# Altium PCB SignalBoard.PcbDoc
Units mm, origin at the board's own origin, x right, y up, seen from the top; angles counter-clockwise.
Board outline 68.58 x 53.34 mm, 2 copper layers (Top Layer, Bottom Layer); 35 components, 39 nets, 133 pads, 32 vias.
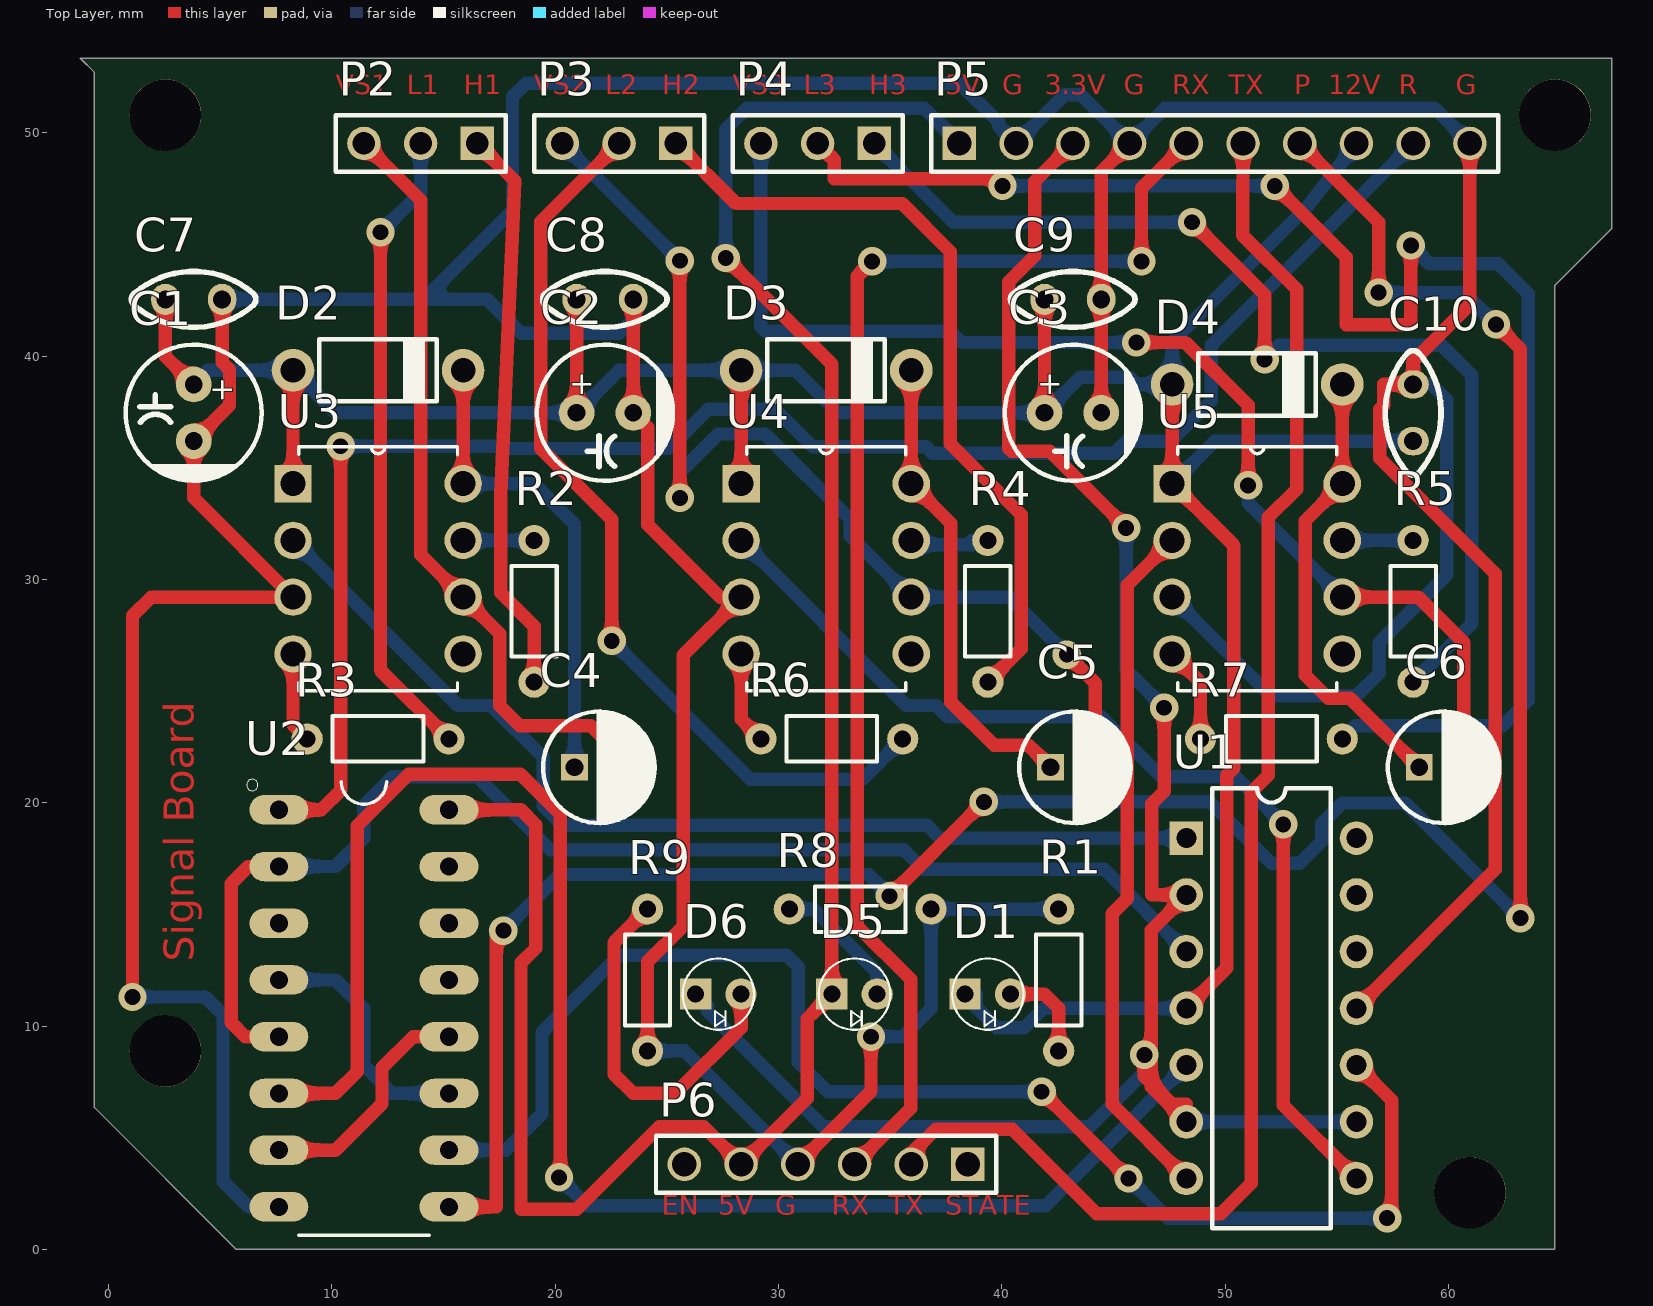
[diagram p0: Top Layer view]
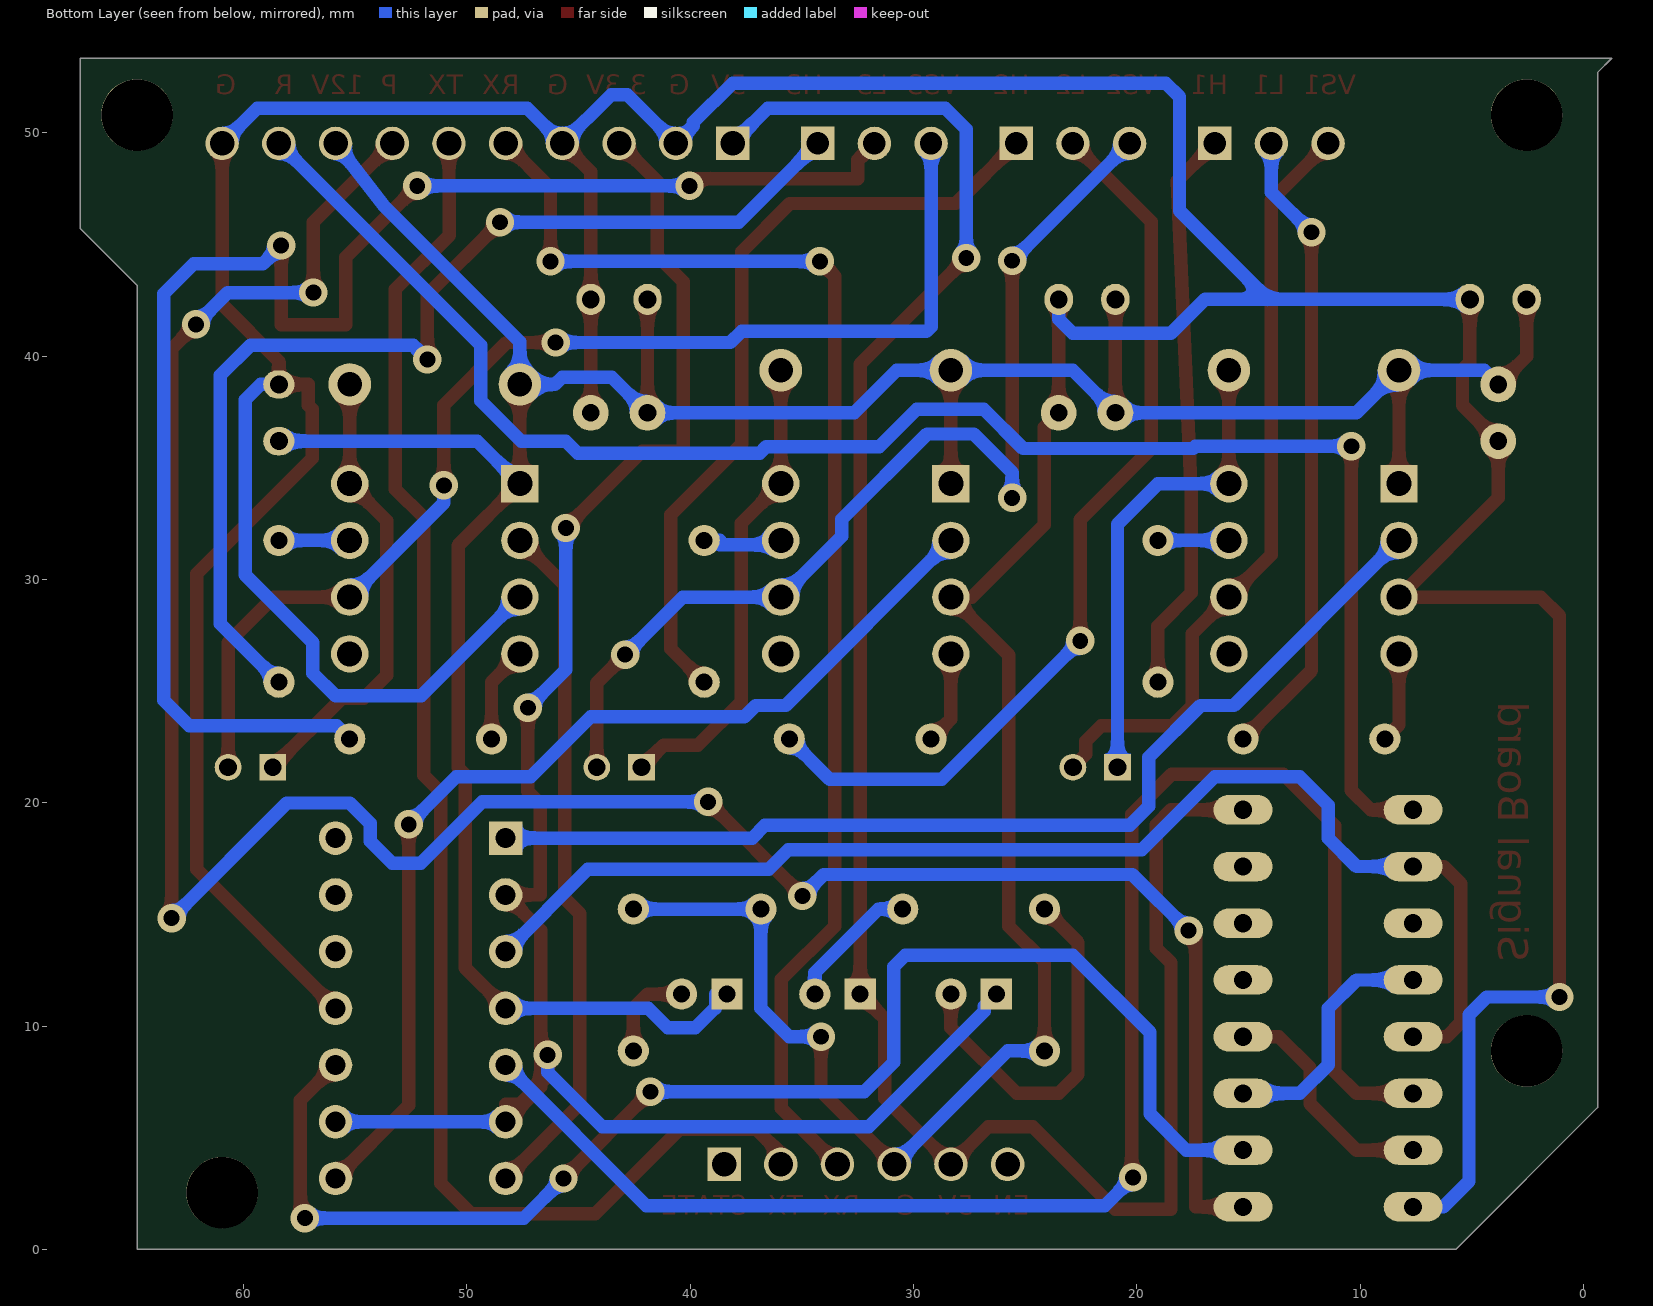
[diagram p1: Bottom Layer view, seen from below]
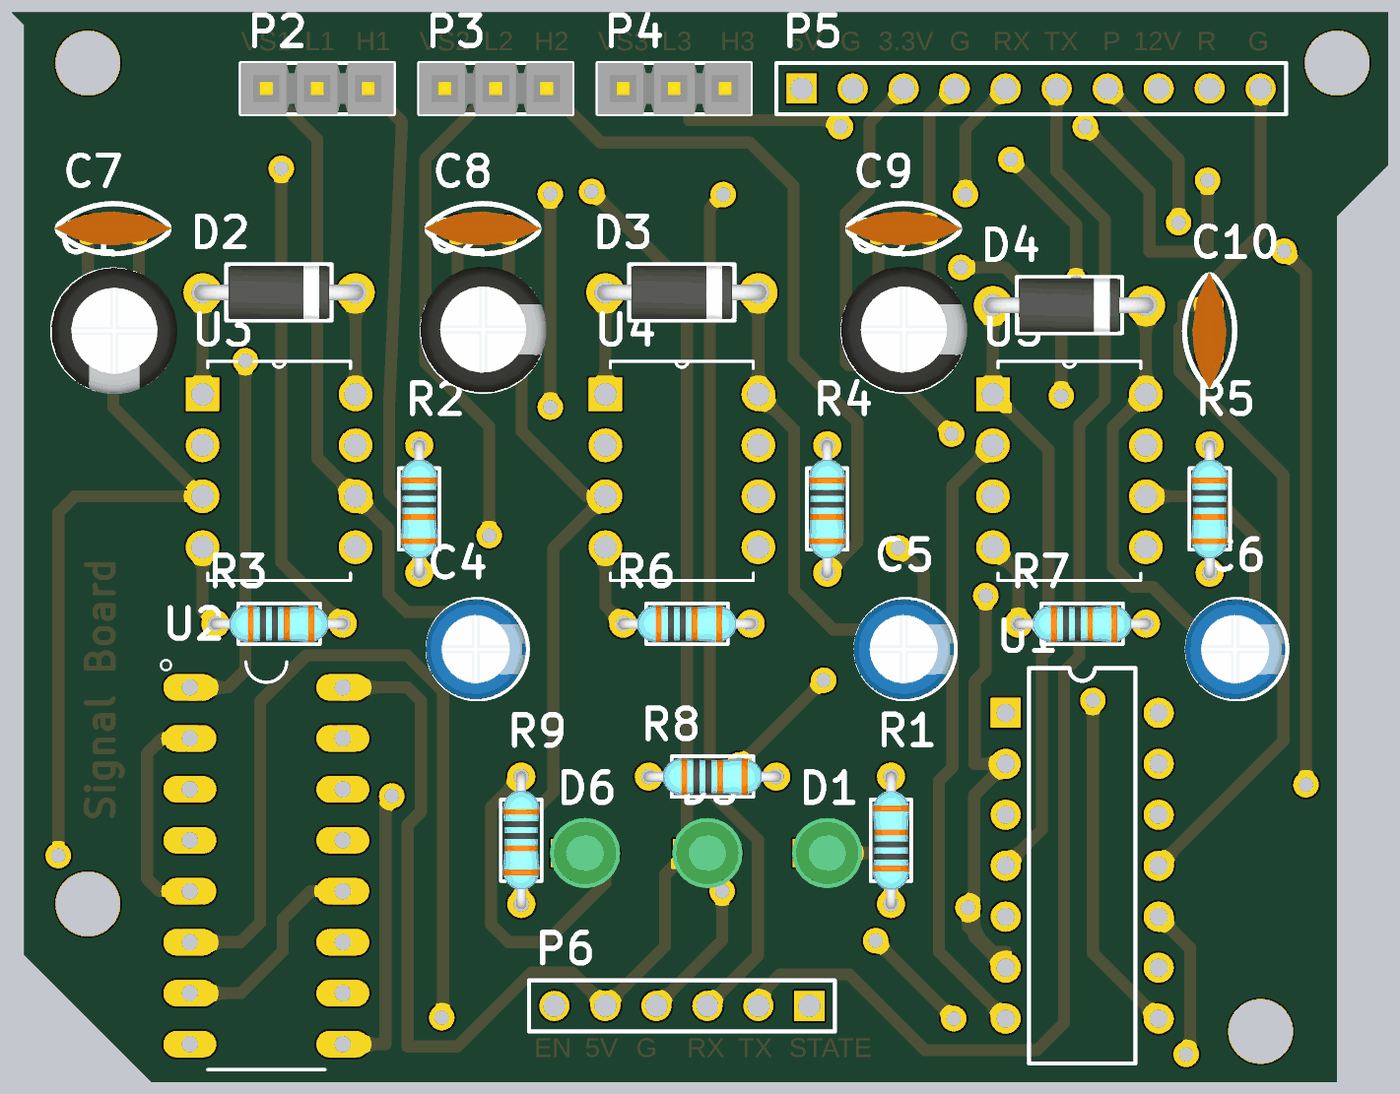
[diagram p2: 3D render of the assembled board from above, using the file's embedded part models]

## Layer stack, top to bottom
Top Solder: solder mask 0.0102, Solder Resist, Dk 3.5
Top Layer: signal copper 0.0356
Dielectric1: dielectric 0.32, FR-4, Dk 4.8
Bottom Layer: signal copper 0.0356
Bottom Solder: solder mask 0.0102, Solder Resist, Dk 3.5

## Board outline
67.31,53.34 67.31,45.72 64.77,43.18 64.77,0 5.715,0 -0.635,6.35 -0.635,52.705 -1.27,53.34

## Design rules (kind name [scope] priority, off if disabled: settings)
Clearance [All] p1: gap=0.5 ignorepadtopadclearanceinfootprint=TRUE
PolygonConnect [All] p1: connectstyle=Relief reliefconductorwidth=0.254 reliefentries=4 polygonreliefangle="90 Angle" airgapwidth=0.254
RoutingVias [All] p1: holewidth=0.711 width=1.27 viastyle="Through Hole" minholewidth=0.711 minwidth=1.27 maxholewidth=0.711 maxwidth=1.27
SilkToSolderMaskClearance SilkscreenOverComponentPads [IsPad] p1: minsilkscreentomaskgap=0.254 clearancetoexposedcopper=TRUE
SolderMaskExpansion [All] p1: expansion=0.102
Width [All] p1: maxlimit=0.7 minlimit=0.6 preferedwidth=0.6
29 further rules are at their usual default settings.

## Components (designator, comment, footprint, x,y, rotation, side; value= is the part's Value field where it differs from the comment)
C1 "1uF" "Cap electrolitic radial 6.3x12-2.5" 3.81,38.735 r270 top
C2 "1uF" "Cap electrolitic radial 6.3x12-2.5" 20.955,37.465 r0 top
C3 "1uF" "Cap electrolitic radial 6.3x12-2.5" 41.91,37.465 r0 top
C4 "1uF" "Cap electrolitic radial 5x11-2" 21.86,21.59 r0 top
C5 "1uF" "Cap electrolitic radial 5x11-2" 43.18,21.59 r0 top
C6 "1uF" "Cap electrolitic radial 5x11-2" 59.69,21.59 r0 top
C7 "100nF" Cap-100nF 3.81,42.545 r180 top
C8 "100nF" Cap-100nF 22.225,42.545 r180 top
C9 "100nF" Cap-100nF 43.18,42.545 r180 top
C10 "100nF" Cap-100nF 58.42,37.465 r270 top
D1 "LED3MM" LED3mm_GRN 39.37,11.43 r0 top
D2 "DIP Diode" "Diode 1n4007" 8.255,39.37 r0 top
D3 "DIP Diode" "Diode 1n4007" 28.321,39.37 r0 top
D4 "DIP Diode" "Diode 1n4007" 47.625,38.735 r0 top
D5 "LED3MM" LED3mm_GRN 33.401,11.43 r0 top
D6 "LED3MM" LED3mm_GRN 27.305,11.43 r0 top
P2 "Header 3" HDR1X3 16.51,49.53 r180 top
P3 "Header 3" HDR1X3 25.4,49.53 r180 top
P4 "Header 3" HDR1X3 34.29,49.53 r180 top
P5 "Header 10" HDR1X10 38.1,49.53 r0 top
P6 "Header 6" HDR1X6 38.481,3.81 r180 top
R1 "1K" Res-(1/4) 42.545,12.065 r90 top
R2 "1K" Res-(1/4) 19.05,28.575 r270 top
R3 "1K" Res-(1/4) 12.065,22.86 r0 top
R4 "1K" Res-(1/4) 39.37,28.575 r270 top
R5 "1K" Res-(1/4) 58.42,28.575 r270 top
R6 "1K" Res-(1/4) 32.385,22.86 r0 top
R7 "1K" Res-(1/4) 52.07,22.86 r0 top
R8 "1K" Res-(1/4) 33.655,15.24 r0 top
R9 "1K" Res-(1/4) 24.13,12.065 r270 top
U1 "LM324N" 646-06 52.07,10.795 r270 top
U2 "SN74175N" *DIP762W46P254L2134H508Q16 11.43,10.795 r0 top
U3 "IR2111" *DIP254P762X533-8 15.875,26.67 r0 top
U4 "IR2111" *DIP254P762X533-8 35.941,26.67 r0 top
U5 "IR2111" *DIP254P762X533-8 55.245,26.67 r0 top

## Footprints (in the part's own frame and the unit in brackets; to place one, negate y for a bottom-side part, rotate by r counter-clockwise, add the part's x,y. Pads: shape width x height; smd on the part's side, far side on the other; paste and mask are expansions set on the pad)
646-06 [mm]
  rect 1.5x1.5 hole 0.9: 1(-7.62,-3.81)
  round 1.5 hole 0.9: 2(-5.08,-3.81) 3(-2.54,-3.81) 4(0,-3.81) 5(2.54,-3.81) 6(5.08,-3.81) 7(7.62,-3.81) 8(7.62,3.81) 9(5.08,3.81) 10(2.54,3.81) 11(0,3.81) 12(-2.54,3.81) 13(-5.08,3.81) 14(-7.62,3.81)
  silkscreen extent -9.85,-2.65 9.85,2.65
*DIP254P762X533-8 [mil]
  rect 66x66 hole 44: 1(-300,300)
  round 66 hole 44: 2(-300,200) 3(-300,100) 4(-300,0) 5(0,0) 6(0,100) 7(0,200) 8(0,300)
  silkscreen extent -290,-65 -10,365
*DIP762W46P254L2134H508Q16 [mil]
  oval 104x52 hole 32: 1(-150,350) 2(-150,250) 3(-150,150) 4(-150,50) 5(-150,-50) 6(-150,-150) 7(-150,-250) 8(-150,-350) 9(150,-350) 10(150,-250) 11(150,-150) 12(150,-50) 13(150,50) 14(150,150) 15(150,250) 16(150,350)
  silkscreen extent -207,-400 115,404
"Cap electrolitic radial 5x11-2" [mm] "Cap electrolitic radial 5x11-2-Design:Abbas Basereh"
  rect 1.2x1.2 hole 0.8: 1(-1,0)
  round 1.2 hole 0.8: 2(1,0)
  silkscreen extent -2.4,-2.5 2.6,2.5, body extent -2.5,-2.5 2.5,2.5, height 11.3
"Cap electrolitic radial 6.3x12-2.5" [mm] "Capacitor Electrolytic D=6.3 x H=12 - P=2.5 mm, Altium Compatible"
  round 1.6 hole 0.8: 1(0,0) 2(2.54,0)
  silkscreen extent -1.78,-3.04 4.32,3.05, body extent -1.87,-3.09 4.43,3.2, height 1.2
Cap-100nF [mm] "Bipolar Capacitor-Design:Ali Hafizi"
  oval 1.27x1.397 hole 0.8: 1(-1.27,0) 2(1.27,0)
  silkscreen extent -2.78,-1.25 2.79,1.25, body extent -2.92,-0.86 2.92,0.83, height 6.92
"Diode 1n4007" [mm] "Diode 1N4007 : 1.0A RECTIFIER Case: DO-41 Case Material: Molded Plastic Terminals: Finish - Bright Tin Weight: 0.30 grams"
  round 1.905 hole 1.1: 1(0,0) 2(7.62,0)
  silkscreen extent 1.18,-1.4 6.43,1.4, body extent -0.41,-1.33 8,1.33, height 3.33
HDR1X3 [mm] "Connector; Header; 3 Position"
  rect 1.5x1.5 hole 1: 1(0,0)
  round 1.5 hole 1: 2(2.54,0) 3(5.08,0)
  silkscreen extent -1.27,-1.27 6.35,1.27, body extent -1.26,-1.27 6.36,1.27, height 8.38
HDR1X6 [mm] "Connector; Header; 6 Position"
  rect 1.5x1.5 hole 1.1: 1(0,0)
  round 1.5 hole 1.1: 2(2.54,0) 3(5.08,0) 4(7.62,0) 5(10.16,0) 6(12.7,0)
  silkscreen extent -1.27,-1.27 13.97,1.27
HDR1X10 [mm] "Connector; Header; 10 Position"
  rect 1.5x1.5 hole 1.1: 1(0,0)
  round 1.5 hole 1.1: 2(2.54,0) 3(5.08,0) 4(7.62,0) 5(10.16,0) 6(12.7,0) 7(15.24,0) 8(17.78,0) 9(20.32,0) 10(22.86,0)
  silkscreen extent -1.27,-1.27 24.13,1.27
LED3mm_GRN [mil]
  rect 55x55 hole 30: 1(-40,0)
  round 55 hole 30: 2(40,0)
  silkscreen extent -63,-63 63,63, body extent -69,-69 69,69, height 154
Res-(1/4) [mil]
  round 55 hole 30: 1(-125,0) 2(125,0)
  silkscreen extent -80,-40 80,40, body extent -135,-36 135,36, height 115

## Part data
C1 C2 C3 C4 C5 C6: library part "Cap ELECTROLITIC TOTAL SIZE", "Cap electrolitic radial", Data=16-12-2016, Designer="Abbas Basereh"
C7 C8 C9 C10: library part "CAP CERAMIC TOTAL SIZE", "CAP Ceramic Total", Designer="Ali Hafizi"
D1 D5 D6: library part "LED 3MM", "Light Emitting Diode", Designer="Ali Hafizi"
D2 D3 D4: library part "Diode DIP Package", "Diode DIP Package", Code_JEDEC=DO-204-AH, ComponentLink1Description="Manufacturer Link", ComponentLink1URL=http://www.fairchildsemi.com/, ComponentLink2Description=Datasheet, ComponentLink2URL=http://www.fairchildsemi.com/ds/1N%2F1N4148.pdf, DatasheetVersion=1997, LatestRevisionDate=17-Jul-2002, LatestRevisionNote="Re-released for DXP Platform.", PackageDescription="Diode, Axial; Body 3.8 x 1.9 mm (LxDia. max), Lead Dia. 0.53 mm (max)", Published=8-Jun-2000, Publisher="Altium Limited"
P2 P3 P4: "Header, 3-Pin", LatestRevisionDate=17-Jul-2002, LatestRevisionNote="Re-released for DXP Platform.", Publisher="Altium Limited"
P5: "Header, 10-Pin", LatestRevisionDate=17-Jul-2002, LatestRevisionNote="Re-released for DXP Platform.", Publisher="Altium Limited"
P6: "Header, 6-Pin", LatestRevisionDate=17-Jul-2002, LatestRevisionNote="Re-released for DXP Platform.", Publisher="Altium Limited"
R1 R2 R3 R4 R5 R6 R7 R8 R9: library part Resistor, "Resistor", Power="1/8 W", Tolerance=5%
U1: "Quad Low-Power Operational Amplifier", ComponentLink1Description="Manufacturer Link", ComponentLink1URL=http://www.onsemi.com/site/products/parametrics/0,4446,251,00.html, ComponentLink2Description=Datasheet, ComponentLink2URL=http://www.onsemi.com/pub/Collateral/LM324-D.PDF, DatasheetVersion=1988, LatestRevisionDate=06-Jun-2005, LatestRevisionNote="Stylized 3D Model Added.", PackageDescription="DIP; 14 Leads; Row Spacing 7.62 mm; Pitch 2.54 mm", PackageReference=646-06, PackageVersion=1997, Published=17-Jul-2002, Publisher="Altium Limited"
U2: "Quadruple D-Type Flip-Flops With Clear 16-PDIP 0 to 70", Package="PDIP-16 Texas Instruments", Availability=Unavailable, MF="Texas Instruments", MP=SN74175N, Price=None, SnapEDA_Link=https://www.snapeda.com/parts/SN74175N/Texas%20Instruments/view-part/?ref=snap
U3 U4 U5: "Half Bridge Driver, Fixed 650ns Deadtime in a 8-Lead package", Package="DIP-8 International Rectifier", Availability=Unavailable, MF=Infineon, MP=IR2111, Price=None, SnapEDA_Link=https://www.snapeda.com/parts/IR2111/Infineon%20Technologies/view-part/?ref=snap

## Free pads (board coordinates)
  round 3.2 hole 3.2: 0(2.54,8.89) 0(2.54,50.8) 0(60.96,2.54) 0(64.77,50.8)

## Via types
v1: diameter 1.27, hole 0.711, Top Layer to Bottom Layer, 32 vias

## Nets (pads, with @x,y where several pads share a name; then routed paths per layer and width w, separated by ;. In a path a pad name is that pad's centre, name@x,y a point inside that pad or via, vN(x,y) a via of type N, cw(c..) or ccw(c..) an arc to the next point about the centre after c; other vN are vias at no path point)
5V: D5.1 P5.1 P6.5 U2.16 | length 95.3
  Top Layer w0.6: U2.16 18.466,19.685 19.131,19.02 19.131,13.494 18.466,12.829 18.466,1.791 20.955,1.791 24.651,5.486 26.645,5.486 P6.5 31.285,6.774 31.285,10.33 D5.1 32.385,39.649 v1(27.635,44.399)
  Bottom Layer w0.6: v1(27.635,44.399) 27.635,50.165 28.575,51.105 36.525,51.105 P5.1
CLK: P5.7 U2.9 | length 109.3
  Top Layer w0.6: U2.9 17.361,1.905 17.361,13.958 v1(17.678,14.275) ; v1(34.976,15.824) v1(39.192,20.041) ; P5.7 56.871,45.999 v1(56.871,42.85) ; v1(62.128,41.427) 63.221,40.335 v1(63.221,14.834)
  Bottom Layer w0.6: v1(17.678,14.275) 20.193,16.789 34.011,16.789 v1(34.976,15.824) ; v1(39.192,20.041) 49.315,20.041 52.07,17.285 53.34,17.285 54.33,18.275 54.33,19.075 55.245,19.99 58.064,19.99 v1(63.221,14.834) ; v1(56.871,42.85) 60.706,42.85 v1(62.128,41.427)
EN: P6.6
GND: C1.2 C2.2 C3.2 C7.1 C8.1 C9.1 C10.1 P5.2 P5.4 P5.10 P6.4 R1.2 R8.2 R9.2 U1.11 U2.8 U3.3 U4.3 U5.3 | length 286.3
  Top Layer w0.6: v1(1.067,11.303) 1.067,28.372 1.905,29.21 U3.3 3.81,33.655 C1.2 5.41,37.795 5.41,39.395 5.08,39.726 C7.1 ; C8.1 C2.2 24.143,36.817 24.143,32.448 27.381,29.21 U4.3 25.73,26.619 25.73,14.478 24.13,12.878 R9.2 ; P6.4 34.138,7.087 v1(34.138,9.525) ; C3.2 C9.1 44.45,48.26 P5.4 ; U1.11 62.103,17.018 62.103,30.251 56.921,35.433 56.921,37.617 57.099,37.795 57.099,38.735 C10.1 58.42,39.776 60.96,42.316 P5.10
  Bottom Layer w0.6: v1(1.067,11.303) 4.318,11.303 5.121,10.5 5.121,3.048 6.264,1.905 U2.8 ; C7.1 14.122,42.545 ; C8.1 23.495,41.656 22.86,41.021 18.466,41.021 16.942,42.545 14.122,42.545 ; R9.2 25.781,8.89 P6.4 ; v1(34.138,9.525) 35.56,9.525 36.83,10.795 R8.2 R1.2 ; U5.3 52.045,24.79 55.88,24.79 56.896,25.806 56.896,27.178 59.919,30.201 59.919,38.041 59.225,38.735 C10.1 ; P5.10 59.385,51.105 47.295,51.105 P5.4 43.536,51.714 42.824,51.714 P5.2 39.853,50.317 39.853,50.47 38.1,52.222 18.694,52.222 18.085,51.613 18.085,46.507 14.122,42.545
H1: P2.1 R2.2 | length 25.5
  Top Layer w0.6: P2.1 18.186,47.854 17.551,33.807 17.551,29.408 19.05,27.91 R2.2
H2: P3.1 R4.2 | length 35.5
  Top Layer w0.6: P3.1 28.092,46.838 35.535,46.838 37.694,44.679 37.694,36.072 40.869,32.897 40.869,26.899 R4.2
H3: P4.1 R5.2 | length 48.1
  Top Layer w0.6: v1(48.514,45.999) 51.765,42.748 v1(51.765,39.853)
  Bottom Layer w0.6: P4.1 37.821,45.999 v1(48.514,45.999) ; v1(51.765,39.853) 52.4,40.488 59.69,40.488 61.036,39.141 61.036,28.016 R5.2
IN1: U1.1 U3.2 | length 46.8
  Bottom Layer w0.6: U3.2 15.646,24.359 17.145,24.359 19.456,22.047 19.456,19.853 20.32,18.989 36.652,18.989 37.227,18.415 U1.1
IN2: U1.8 U4.2 | length 46.8
  Top Layer w0.6: v1(52.603,19.035) 52.603,6.452 U1.8
  Bottom Layer w0.6: U4.2 35.712,24.359 37.059,24.359 37.567,23.851 44.45,23.851 47.142,21.158 50.48,21.158 v1(52.603,19.035)
IN3: U1.7 U5.2 | length 31.1
  Top Layer w0.6: U5.2 45.61,29.735 45.61,15.714 44.94,15.044 44.94,6.495 U1.7
IN11: U1.3 U2.2 U2.5 | length 57.5
  Top Layer w0.6: U2.5 6.121,9.525 5.486,10.16 5.486,16.383 6.248,17.145 U2.2
  Bottom Layer w0.6: U2.2 10.16,17.145 11.43,18.415 11.43,19.888 12.7,21.158 16.51,21.158 19.779,17.889 35.611,17.889 36.482,17.018 44.577,17.018 U1.3
IN22: U1.5 U2.6 | length 73.3
  Top Layer w0.6: U2.6 10.16,6.985 11.125,7.95 11.125,18.979 13.432,21.285 18.44,21.285 20.231,19.495 20.231,3.289 v1(20.168,3.226)
  Bottom Layer w0.6: v1(20.168,3.226) 21.438,1.956 41.961,1.956 U1.5
IN33: U1.10 U2.10 | length 62.7
  Top Layer w0.6: v1(41.783,7.061) v1(45.669,3.175) ; U1.10 57.455,6.68 57.455,1.6 v1(57.252,1.397)
  Bottom Layer w0.6: U2.10 17.78,4.445 19.406,6.071 19.406,9.72 22.86,13.175 30.361,13.175 30.886,12.649 30.886,8.378 32.203,7.061 v1(41.783,7.061) ; v1(45.669,3.175) 47.447,1.397 v1(57.252,1.397)
L1: P2.2 R3.2 | length 28.7
  Top Layer w0.6: v1(12.174,45.55) 12.174,25.926 R3.2
  Bottom Layer w0.6: v1(12.174,45.55) 13.97,47.346 P2.2
L2: P3.2 R6.2 | length 41.4
  Top Layer w0.6: v1(22.531,27.253) 22.531,32.689 19.355,35.865 19.355,46.025 P3.2
  Bottom Layer w0.6: v1(22.531,27.253) 28.727,21.057 33.757,21.057 R6.2
L3: P4.2 R7.2 | length 69.2
  Top Layer w0.6: P4.2 32.487,48.793 32.487,47.955 39.7,47.955 v1(40.03,47.625) ; v1(52.222,47.625) 55.423,44.425 55.423,41.402 58.318,41.402 v1(58.318,44.958)
  Bottom Layer w0.6: v1(40.03,47.625) v1(52.222,47.625) ; R7.2 55.829,23.444 62.433,23.444 63.576,24.587 63.576,42.799 62.23,44.145 59.131,44.145 v1(58.318,44.958)
NetD1_2: D1.2 R1.1 | length 4.3
  Top Layer w0.6: D1.2 41.91,11.43 42.545,10.795 R1.1
NetD5_2: D5.2 R8.1 | length 6.1
  Bottom Layer w0.6: R8.1 31.572,15.24 34.417,12.395 D5.2
NetD6_2: D6.2 R9.1 | length 16.8
  Top Layer w0.6: R9.1 22.631,13.741 22.631,7.849 23.495,6.985 25.375,6.985 28.321,9.931 D6.2
NetR2_1: R2.1 U3.7 | length 3.2
  Bottom Layer w0.6: U3.7 R2.1
NetR3_1: R3.1 U3.4 | length 4.1
  Top Layer w0.6: U3.4 8.255,23.495 R3.1
NetR4_1: R4.1 U4.7 | length 3.7
  Bottom Layer w0.6: U4.7 36.139,31.552 38.679,31.552 38.679,31.75 R4.1
NetR5_1: R5.1 U5.7 | length 3.2
  Bottom Layer w0.6: U5.7 R5.1
NetR6_1: R6.1 U4.4 | length 4.2
  Top Layer w0.6: U4.4 28.321,23.749 R6.1
NetR7_1: R7.1 U5.4 | length 4.3
  Top Layer w0.6: U5.4 48.895,25.4 R7.1
NetU2_4: U2.4 U2.11 | length 11.2
  Bottom Layer w0.6: U2.4 10.16,12.065 11.43,10.795 11.43,8.255 12.7,6.985 U2.11
NetU2_7: U2.7 U2.12 | length 10.7
  Top Layer w0.6: U2.7 10.16,4.445 12.243,6.528 12.243,8.128 13.64,9.525 U2.12
RESET: P5.9 U2.1 | length 75.4
  Top Layer w0.6: U2.1 9.525,19.685 10.389,20.549 v1(10.389,35.966)
  Bottom Layer w0.6: v1(10.389,35.966) 17.374,35.966 17.475,35.865 25.095,35.865 26.848,37.618 29.846,37.618 31.523,35.941 36.601,35.941 36.881,35.662 45.034,35.662 45.568,36.195 47.563,36.195 49.377,38.009 49.377,40.487 P5.9
RXA: P5.5 P6.3 | length 60.9
  Top Layer w0.6: P6.3 35.916,6.325 35.916,12.09 33.528,14.478 33.528,43.586 v1(34.188,44.247) ; v1(46.253,44.247) 46.253,47.523 P5.5
  Bottom Layer w0.6: v1(34.188,44.247) v1(46.253,44.247)
RXB: P5.6 P6.2 | length 66.7
  Top Layer w0.6: P6.2 35.941,4.293 37.033,5.385 40.462,5.385 44.247,1.6 49.809,1.6 51.168,2.959 51.168,20.47 51.931,21.232 51.931,32.779 53.2,34.048 53.2,42.993 50.787,45.406 50.787,47.828 50.8,47.841 P5.6
STATE: P6.1
VB1: C4.1 D2.2 U3.8 | length 21.7
  Top Layer w0.6: U3.8 D2.2
  Bottom Layer w0.6: U3.8 19.05,34.29 20.86,32.48 C4.1
VB2: C5.1 D3.2 U4.8 | length 21.3
  Top Layer w0.6: D3.2 U4.8 37.719,32.512 37.719,24.511 39.654,22.576 41.194,22.576 C5.1
VB3: C6.1 D4.2 U5.8 | length 20.5
  Top Layer w0.6: D4.2 U5.8 53.594,32.639 53.594,25.705 54.61,24.689 55.591,24.689 C6.1
VCC: C1.1 C2.1 C3.1 C7.2 C8.2 C9.2 C10.2 D1.1 D2.1 D3.1 D4.1 P5.8 U1.4 U3.1 U4.1 U5.1 | length 138.8
  Top Layer w0.6: C7.2 2.54,40.005 C1.1 ; U3.1 D2.1 ; C2.1 C8.2 ; U4.1 D3.1 ; C3.1 C9.2 ; D4.1 U5.1 50.394,31.521 50.394,21.57 50.068,21.244 50.068,12.603 U1.4
  Bottom Layer w0.6: C1.1 4.445,39.37 D2.1 10.16,37.465 C2.1 22.86,39.37 D3.1 30.74,39.37 32.645,37.465 C3.1 43.51,39.065 45.72,39.065 46.05,38.735 D4.1 47.625,40.64 53.696,46.711 P5.8 ; D1.1 38.862,11.43 38.862,10.795 38.902,10.795 39.765,9.932 41.007,9.932 41.87,10.795 U1.4 ; U5.1 49.53,36.195 C10.2
VCC3.3: D6.1 P5.3 U1.2 U1.6 U1.9 | length 88.2
  Top Layer w0.6: P5.3 41.478,47.828 41.478,44.501 40.31,43.332 40.31,35.865 40.437,35.738 42.139,35.738 v1(45.568,32.309) ; v1(46.38,8.712) 46.38,7.747 46.685,7.442 ; v1(47.269,24.257) 47.269,20.524 46.71,19.964 46.71,15.875 U1.2 46.685,14.3 46.685,7.442 ; 46.685,7.442 46.685,7.29 U1.6 48.26,6.502 47.625,6.502 46.685,7.442
  Bottom Layer w0.6: D6.1 26.822,10.897 26.822,10.668 32.004,5.486 43.936,5.486 46.38,7.931 v1(46.38,8.712) ; v1(45.568,32.309) 45.568,25.959 v1(47.269,24.257) ; U1.6 U1.9
VS1: C4.2 P2.3 U3.6 | length 34.5
  Top Layer w0.6: P2.3 13.97,46.99 13.97,31.115 U3.6 17.513,27.572 17.513,24.346 18.415,23.444 21.59,23.444 22.276,22.758 22.276,22.174 C4.2
VS2: C5.2 P3.3 U4.6 | length 47.3
  Top Layer w0.6: v1(25.578,33.655) v1(25.578,44.272) ; v1(42.91,26.635) 44.18,25.365 C5.2
  Bottom Layer w0.6: P3.3 v1(25.578,44.272) ; v1(25.578,33.655) 25.578,34.79 27.305,36.517 29.391,36.517 33.211,32.697 33.211,31.94 U4.6 40.335,29.21 v1(42.91,26.635)
VS3: C6.2 P4.3 U5.6 | length 53.7
  Top Layer w0.6: v1(46.025,40.615) 48.224,40.615 51.029,37.81 v1(51.029,34.214) ; U5.6 58.658,29.21 60.69,27.178 C6.2
  Bottom Layer w0.6: P4.3 29.21,41.326 29.413,41.123 37.694,41.123 38.202,40.615 v1(46.025,40.615) ; v1(51.029,34.214) 51.029,33.426 U5.6
pads on no net: U1.12 U1.13 U1.14 U2.3 U2.13 U2.14 U2.15 U3.5 U4.5 U5.5

## Other copper
Top Layer:
  text "VS1" at 10.16,51.435 h1.52
  text "L1" at 13.351,51.435 h1.52
  text "H1" at 15.891,51.435 h1.52
  text "VS2" at 19.05,51.435 h1.52
  text "L2" at 22.241,51.435 h1.52
  text "H2" at 24.781,51.435 h1.52
  text "VS3" at 27.94,51.435 h1.52
  text "L3" at 31.131,51.435 h1.52
  text "H3" at 34.052,51.435 h1.52
  text "5V" at 37.465,51.435 h1.52
  text "G" at 40.021,51.435 h1.52
  text "3.3V" at 41.91,51.435 h1.52
  text "G" at 45.466,51.435 h1.52
  text "RX" at 47.625,51.435 h1.52
  text "TX" at 50.165,51.435 h1.52
  text "P" at 53.086,51.435 h1.52
  text "12V" at 54.61,51.435 h1.52
  text "R" at 57.785,51.435 h1.52
  text "G" at 60.325,51.435 h1.52
  text "Signal Board" at 3.81,12.878 h1.34 r90
  text "EN" at 24.765,1.27 h1.52
  text "5V" at 27.305,1.27 h1.52
  text "G" at 29.845,1.27 h1.52
  text "RX" at 32.385,1.27 h1.52
  text "TX" at 34.925,1.27 h1.52
  text "STATE" at 37.465,1.27 h1.52

## Silkscreen, mask and mechanical layers (free items; w line width, h text height)
Mechanical 1:
  lines w0.127: -0.635,6.198 5.563,0 64.77,0 64.77,43.18 67.31,45.72 67.31,53.34 -0.635,53.34 -0.635,6.198
  lines w0.254: -0.002,-4.064 0.002,-3.556 ; 1.519,-4.333 0,-3.81 ; 1.529,-3.317 0,-3.81 ; 24.361,-4.049 0,-3.81 ; 40.409,-4.206 64.77,-4.445 ; 63.241,-4.938 64.77,-4.445 ; 63.251,-3.922 64.77,-4.445 ; 64.768,-4.699 64.772,-4.191 ; 72.517,1.524 73.025,0 ; 72.517,51.816 73.025,53.34 ; 72.771,0 73.279,0 ; 72.771,53.34 73.279,53.34 ; 73.025,19.408 73.025,0 ; 73.025,33.932 73.025,53.34 ; 73.533,1.524 73.025,0 ; 73.533,51.816 73.025,53.34
  text "53.34 (mm)" at 73.939,19.662 h1.52 r90
  text "64.773 (mm)" at 24.606,-4.965 h1.52 r359.44

## Text inside footprints (layer, text, board x,y; h text height)
C1: Top Overlay "+" at 4.65,39.055 h1 r270
C2: Top Overlay "+" at 20.635,38.305 h1
C3: Top Overlay "+" at 41.59,38.305 h1